# EAGLE board zumy carrier board (EAGLE 6.6.0)
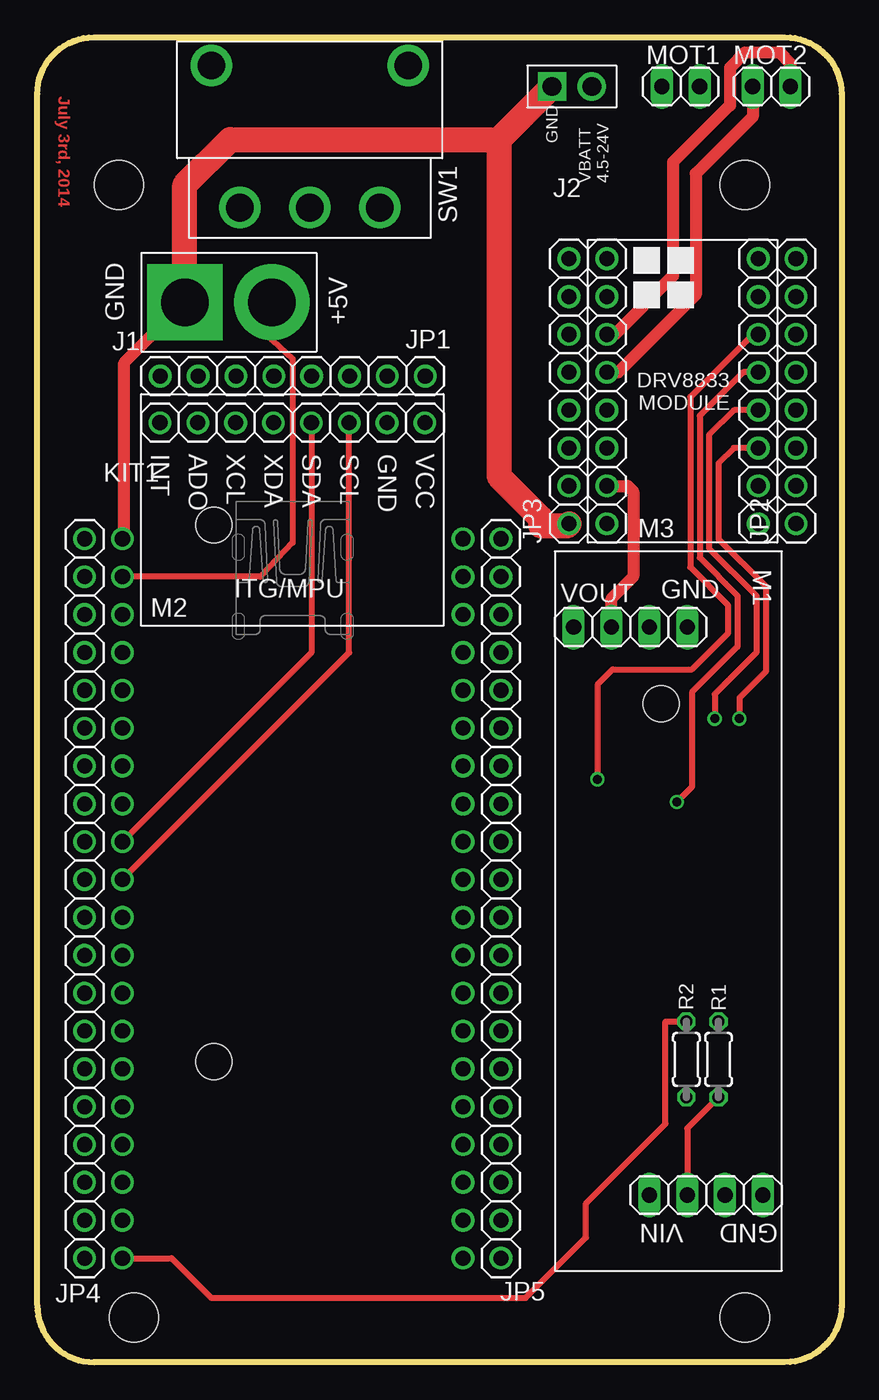
[diagram p0: board, top side]
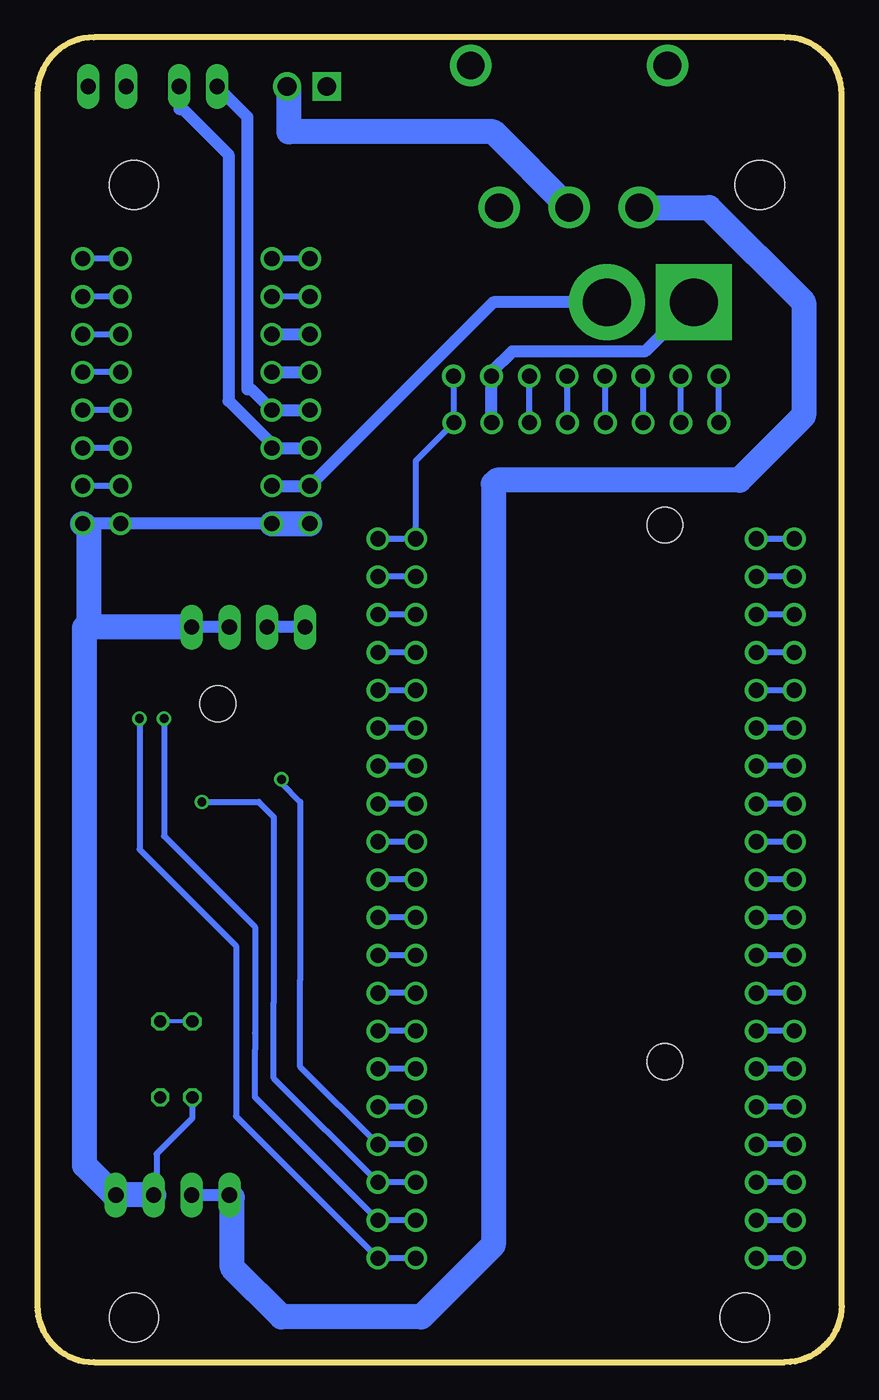
[diagram p1: board, bottom side, seen from below]

Size 53.98 x 88.9 mm. Coordinates in mm from the lower left corner, seen from the top.
Outline: 0,3.81 0,85.09 arc-90 3.81,88.9 50.16,88.9 arc-90 53.98,85.09 53.98,3.81 arc-90 50.16,0 3.81,0 arc-90 0,3.81
Copper layers (1*16): Top 2mil / dielectric 27mil / Bottom 2mil
Design rules "advancedcircuits-standard-biomimetic": minimum track width 5mil, minimum drill 10mil, track to track 5mil, track to pad 5mil, pad to pad 5mil, via to via 5mil, smd to smd 5mil, copper to edge 0.256540625mm, drill to drill 0.256540625mm, minimum pad ring 0.180340625mm, minimum via ring 0.180340625mm, stop-mask expansion 2mil, vias tented up to drill 0mil, thermal gap 10mil
Holes 3.3 mm at 6.49,3 47.49,3 5.49,79 47.49,79
Holes 2.4 mm at 11.86,20.18 41.86,44.18 11.86,56.18

## Footprints (pad centres in the part's own frame; a part is rotated, then mirrored left to right if it is on the bottom)
ODOIRD_PWR = drill 3.2 pad 5.08 square: GND 0,0 | drill 3.2 pad 5.08: PWR 5.842,0
BATT_POWER = drill 1.27 square: GND 0,0 | drill 1.27: PWR 2.667,0
1X08 = drill 1.016: 1 -8.89,0; 2 -6.35,0; 3 -3.81,0; 4 -1.27,0; 5 1.27,0; 6 3.81,0; 7 6.35,0; 8 8.89,0
1X20 = drill 1.016: 1 -24.13,0; 2 -21.59,0; 3 -19.05,0; 4 -16.51,0; 5 -13.97,0; 6 -11.43,0; 7 -8.89,0; 8 -6.35,0; 9 -3.81,0; 10 -1.27,0; 11 1.27,0; 12 3.81,0; 13 6.35,0; 14 8.89,0; 15 11.43,0; 16 13.97,0; 17 16.51,0; 18 19.05,0; 19 21.59,0; 20 24.13,0
MBED-KIT = drill 1.016: D+ 11.43,1.27; D- 11.43,3.81; GND -11.43,24.13; IF+ 11.43,16.51; IF- 11.43,19.05; NR -11.43,16.51; P$5 -11.43,13.97; P$6 -11.43,11.43; P$7 -11.43,8.89; P$8 -11.43,6.35; P$9 -11.43,3.81; P$10 -11.43,1.27; P$11 -11.43,-1.27; P$12 -11.43,-3.81; P$13 -11.43,-6.35; P$14 -11.43,-8.89; P$15 -11.43,-11.43; P$16 -11.43,-13.97; P$17 -11.43,-16.51; P$18 -11.43,-19.05; P$19 -11.43,-21.59; P$20 -11.43,-24.13; P$21 11.43,-24.13; P$22 11.43,-21.59; P$23 11.43,-19.05; P$24 11.43,-16.51; P$25 11.43,-13.97; P$26 11.43,-11.43; P$27 11.43,-8.89; P$28 11.43,-6.35; P$29 11.43,-3.81; P$30 11.43,-1.27; RD+ 11.43,11.43; RD- 11.43,13.97; TD+ 11.43,6.35; TD- 11.43,8.89; VB -11.43,19.05; VIN -11.43,21.59; VOUT 11.43,24.13; VU 11.43,21.59
POLOLU_STEP_DOWN = drill 1.016 long: GND1 -19.05,1.27; GND2 -19.05,-1.27; GND3 19.05,6.35; GND4 19.05,3.81; VIN1 19.05,1.27; VIN2 19.05,-1.27; VOUT1 -19.05,-3.81; VOUT2 -19.05,-6.35
ITG/MPU_MODULE = drill 1.016: ADO -6.372,7.284; GND 6.328,7.284; INT -8.912,7.284; SCL 3.788,7.284; SDA 1.248,7.284; VCC 8.868,7.284; XCL -3.832,7.284; XDA -1.292,7.284
POLOLU_DRV8833_MODULE = drill 1.016: AIN1 1.27,6.35; AIN2 1.27,8.89; AISEN 11.43,3.81; AOUT1 11.43,6.35; AOUT2 11.43,8.89; BIN1 1.27,13.97; BIN2 1.27,11.43; BISEN 11.43,1.27; BOUT1 11.43,13.97; BOUT2 11.43,11.43; GND1 1.27,19.05; GND2 11.43,19.05; NFAULT 1.27,1.27; NSLEEP 1.27,3.81; VIN 11.43,16.51; VMM 1.27,16.51
1X02 = drill 1.016 long: 1 -1.27,0; 2 1.27,0
0204/5 = drill 0.813 octagon: 1 -2.54,0; 2 2.54,0
500SSP1S1M6QEA_SWITCH = drill 1.854: 1 -4.699,0; 2 0,0; 3 4.699,0; P$4 -6.604,9.525; P$5 6.604,9.525

## Placement (x,y rotation side)
J1  ODROID_POWER  [ODOIRD_PWR]  9.91,71.12 0 top
J2  BATT_POWER  [BATT_POWER]  34.54,85.6 0 top
JP1  [1X08]  17.14,66.17 0 top
JP2  [1X08]  50.93,65.15 90 top
JP3  [1X08]  35.69,65.15 90 top
JP4  [1X20]  3.17,31.11 270 top
JP5  [1X20]  31.11,31.11 90 top
KIT1  MBED_NXP_LPC1768  [MBED-KIT]  17.14,31.11 0 top
M1  POLOLU_STEP_DOWN  [POLOLU_STEP_DOWN]  42.35,30.27 270 top
M2  ITG/MPU_MODULE  [ITG/MPU_MODULE]  17.14,55.75 0 top
M3  POLOLU_DRV8833_MODULE  [POLOLU_DRV8833_MODULE]  49.66,75.31 180 top
MOT1  [1X02]  43.18,85.6 180 top
MOT2  [1X02]  49.28,85.6 180 top
R1  [0204/5]  45.72,20.32 270 top
R2  [0204/5]  43.56,20.32 90 top
SW1  500SSP1S1M6QEA  [500SSP1S1M6QEA_SWITCH]  18.29,77.47 0 top

## Library data of the parts
J1 J2 JP1-JP5 KIT1 M1-M3 SW1 = zumy
MOT1 MOT2 = pinhead
R1 R2 = resistor

## Nets
+3V3: JP1.8 JP5.20 KIT1.VOUT M2.VCC
+5V: J1.PWR JP3.2 JP4.2 KIT1.VIN M1.VOUT1 M1.VOUT2 M3.VIN
AIN1: JP2.6 JP5.4 KIT1.P$24 M3.AIN1
AIN2: JP2.5 JP5.3 KIT1.P$23 M3.AIN2
BIN1: JP2.3 JP5.1 KIT1.P$21 M3.BIN1
BIN2: JP2.4 JP5.2 KIT1.P$22 M3.BIN2
GND: J1.GND J2.GND JP1.7 JP2.1 JP3.1 JP4.1 KIT1.GND M1.GND1 M1.GND2 M1.GND3 M1.GND4 M2.GND M3.GND1 M3.GND2 R2.1
MPU_SCL: JP1.6 JP4.10 KIT1.P$10 M2.SCL
MPU_SDA: JP1.5 JP4.9 KIT1.P$9 M2.SDA
N$1: JP1.1 M2.INT
N$2: JP1.2 M2.ADO
N$3: JP1.3 M2.XCL
N$4: JP1.4 M2.XDA
N$10: JP4.15 KIT1.P$15
N$11: JP4.3 KIT1.VB
N$12: JP4.4 KIT1.NR
N$13: JP4.5 KIT1.P$5
N$14: JP4.6 KIT1.P$6
N$15: JP4.7 KIT1.P$7
N$16: JP4.8 KIT1.P$8
N$19: JP4.11 KIT1.P$11
N$20: JP4.12 KIT1.P$12
N$21: JP4.13 KIT1.P$13
N$22: JP4.14 KIT1.P$14
N$24: JP4.16 KIT1.P$16
N$25: JP4.17 KIT1.P$17
N$26: JP4.18 KIT1.P$18
N$27: JP4.19 KIT1.P$19
N$33: JP5.5 KIT1.P$25
N$34: JP5.6 KIT1.P$26
N$35: JP5.7 KIT1.P$27
N$36: JP5.8 KIT1.P$28
N$37: JP5.9 KIT1.P$29
N$38: JP5.10 KIT1.P$30
N$39: JP5.11 KIT1.D+
N$40: JP5.12 KIT1.D-
N$41: JP5.13 KIT1.TD+
N$42: JP5.14 KIT1.TD-
N$43: JP5.15 KIT1.RD+
N$44: JP5.16 KIT1.RD-
N$45: JP5.17 KIT1.IF+
N$46: JP5.18 KIT1.IF-
N$47: JP5.19 KIT1.VU
N$50: JP2.2 M3.VMM
N$55: JP2.7 M3.NSLEEP
N$56: JP2.8 M3.NFAULT
N$59: JP3.3 M3.BOUT1 MOT1.1
N$60: JP3.4 M3.BOUT2 MOT1.2
N$61: JP3.5 M3.AOUT2 MOT2.2
N$62: JP3.6 M3.AOUT1 MOT2.1
N$63: JP3.7 M3.AISEN
N$64: JP3.8 M3.BISEN
SW_VBATT: M1.VIN1 M1.VIN2 R1.2 SW1.1
V_BATT_SENSE: JP4.20 KIT1.P$20 R1.1 R2.2
VBATT: J2.PWR SW1.2

## Tracks (layer width: path | path; a pad name or v marks a point on that pad's centre or on a via)
+3V3
  Bottom 0.406: JP1.8 26.01,66.17 M2.VCC 28.57,60.48 KIT1.VOUT JP5.20
+5V
  Top 0.406: J1.PWR 15.75,68.58 17.14,67.31 17.14,54.99 14.99,52.7 KIT1.VIN
  Top 0.813: M3.VIN 39.62,58.8 40.01,58.42 40.01,52.7 38.54,51.24 M1.VOUT1
  Bottom 0.406: JP4.2 KIT1.VIN
  Bottom 0.813: M3.VIN JP3.2 23.37,71.12 J1.PWR | M1.VOUT2 M1.VOUT1
AIN1  (via drill 0.6)
  Top 0.406: M3.AIN1 48.01,68.96 43.81,64.77 43.81,53.34 46.35,50.8 46.35,48.9 43.94,46.48 38.61,46.48 37.59,45.47 v37.59,39.12
  Bottom 0.406: M3.AIN1 JP2.6 | KIT1.P$24 JP5.4 36.32,19.81 36.32,25.65 36.32,26.16 36.32,37.59 37.59,38.86 v37.59,39.12
AIN2  (via drill 0.6)
  Top 0.406: M3.AIN2 47.37,66.42 44.45,63.5 44.45,53.98 46.99,51.44 46.99,48.01 43.94,44.96 43.94,38.61 v42.93,37.59
  Bottom 0.406: M3.AIN2 JP2.5 | KIT1.P$23 JP5.3 38.1,19.05 38.1,24.13 38.1,25.15 38.1,36.58 39.12,37.59 v42.93,37.59
BIN1  (via drill 0.6)
  Top 0.406: M3.BIN1 46.74,61.34 45.72,60.33 45.72,55.24 48.9,52.07 48.9,46.35 47.12,44.58 v47.12,43.18
  Bottom 0.406: M3.BIN1 JP2.3 | KIT1.P$21 JP5.1 40.64,16.51 40.64,27.94 47.12,34.42 v47.12,43.18
BIN2  (via drill 0.6)
  Top 0.406: M3.BIN2 46.74,63.88 45.09,62.23 45.09,54.61 48.26,51.44 48.26,47.62 45.47,44.83 v45.47,43.18
  Bottom 0.406: M3.BIN2 JP2.4 | KIT1.P$22 JP5.2 39.37,17.78 39.37,20.95 39.37,22.1 39.37,29.21 45.47,35.31 v45.47,43.18
GND
  Top 0.813: KIT1.GND 5.84,55.37 5.84,67.06 J1.GND
  Top 1.676: 30.99,82.04 J2.GND | 30.99,82.04 12.95,82.04 9.91,78.99 J1.GND | 30.99,82.04 30.99,59.44 33.78,56.64 33.78,56.13 35.56,56.13 JP3.1
  Bottom 0.406: JP4.1 KIT1.GND | M3.GND1 48.77,55.88 | R2.1 43.56,16.38 45.97,13.97 45.97,11.4 M1.GND4 | 23.5,66.42 JP1.7 | M2.GND 23.5,63.06
  Bottom 0.813: JP2.1 M3.GND1 M3.GND2 | M1.GND2 M1.GND1 | J1.GND 13.21,67.82 22.1,67.82 23.5,66.42 | 23.5,63.06 JP1.7
  Bottom 1.676: M3.GND2 JP3.1 | 50.8,49.02 50.8,13.21 48.81,11.22 M1.GND3 M1.GND4 | 50.8,49.02 50.8,49.28 | M1.GND1 50.5,49.32 | 50.5,49.32 50.8,49.02 | 50.5,49.32 50.5,55.84 JP2.1
MPU_SCL
  Top 0.406: KIT1.P$10 20.93,47.6 M2.SCL
  Bottom 0.127: 3.3,32.26 JP4.10
  Bottom 0.406: M2.SCL 20.93,66.17 JP1.6 | JP4.10 KIT1.P$10
MPU_SDA
  Top 0.127: 3.3,34.8 JP4.9
  Top 0.406: M2.SDA 18.39,47.6 KIT1.P$9
  Bottom 0.406: M2.SDA 18.39,66.17 JP1.5 | JP4.9 KIT1.P$9
N$1
  Bottom 0.406: M2.INT 8.23,66.17 JP1.1
N$2
  Bottom 0.406: M2.ADO 10.77,66.17 JP1.2
N$3
  Bottom 0.406: M2.XCL 13.31,66.17 JP1.3
N$4
  Bottom 0.406: M2.XDA 15.85,66.17 JP1.4
N$10
  Bottom 0.406: JP4.15 KIT1.P$15
N$11
  Bottom 0.406: JP4.3 KIT1.VB
N$12
  Bottom 0.406: JP4.4 KIT1.NR
N$13
  Bottom 0.406: JP4.5 KIT1.P$5
N$14
  Bottom 0.406: JP4.6 KIT1.P$6
N$15
  Bottom 0.406: JP4.7 KIT1.P$7
N$16
  Bottom 0.406: JP4.8 KIT1.P$8
N$19
  Bottom 0.406: JP4.11 KIT1.P$11
N$20
  Bottom 0.406: JP4.12 KIT1.P$12
N$21
  Bottom 0.406: JP4.13 KIT1.P$13
N$22
  Bottom 0.406: JP4.14 KIT1.P$14
N$24
  Bottom 0.406: JP4.16 KIT1.P$16
N$25
  Bottom 0.406: JP4.17 KIT1.P$17
N$26
  Bottom 0.406: JP4.18 KIT1.P$18
N$27
  Bottom 0.406: JP4.19 KIT1.P$19
N$33
  Bottom 0.406: KIT1.P$25 JP5.5
N$34
  Bottom 0.406: KIT1.P$26 JP5.6
N$35
  Bottom 0.406: KIT1.P$27 JP5.7
N$36
  Bottom 0.406: KIT1.P$28 JP5.8
N$37
  Bottom 0.406: KIT1.P$29 JP5.9
N$38
  Bottom 0.406: KIT1.P$30 JP5.10
N$39
  Bottom 0.406: KIT1.D+ JP5.11
N$40
  Bottom 0.406: KIT1.D- JP5.12
N$41
  Bottom 0.406: KIT1.TD+ JP5.13
N$42
  Bottom 0.406: KIT1.TD- JP5.14
N$43
  Bottom 0.406: KIT1.RD+ JP5.15
N$44
  Bottom 0.406: KIT1.RD- JP5.16
N$45
  Bottom 0.406: KIT1.IF+ JP5.17
N$46
  Bottom 0.406: KIT1.IF- JP5.18
N$47
  Bottom 0.406: KIT1.VU JP5.19
N$50
  Bottom 0.406: M3.VMM JP2.2
N$55
  Bottom 0.406: M3.NSLEEP JP2.7
N$56
  Bottom 0.406: M3.NFAULT JP2.8
N$59
  Bottom 0.813: JP3.3 M3.BOUT1 38.23,61.59 41.15,64.52 41.15,81.03 44.2,84.07 44.45,84.07 MOT1.1
N$60
  Bottom 0.813: JP3.4 M3.BOUT2 39.62,65.28 39.88,65.28 39.88,83.57 MOT1.2
N$61
  Top 0.813: MOT2.2 48.01,83.57 44.2,79.76 44.2,71.63 38.99,66.42 M3.AOUT2
  Bottom 0.813: M3.AOUT2 JP3.5
N$62
  Top 0.813: M3.AOUT1 38.73,68.96 42.67,72.9 42.67,80.52 46.48,84.33 46.48,86.87 47.5,87.88 49.78,87.88 50.55,87.12 MOT2.1
  Bottom 0.813: JP3.6 M3.AOUT1
N$63
  Bottom 0.406: JP3.7 M3.AISEN
N$64
  Bottom 0.406: JP3.8 M3.BISEN
SW_VBATT
  Top 0.406: R1.2 43.62,15.68 M1.VIN1
  Bottom 0.813: M1.VIN1 M1.VIN2
  Bottom 1.676: SW1.1 8.89,77.47 2.54,71.12 2.54,63.5 6.86,59.18 23.11,59.18 23.37,58.93 23.37,7.87 28.19,3.05 37.59,3.05 40.89,6.35 40.89,11.03 M1.VIN2
V_BATT_SENSE
  Top 0.406: KIT1.P$20 9.02,6.99 11.68,4.32 32.77,4.32 36.83,8.38 36.83,10.67 42.16,16 42.16,22.86 R2.2
  Bottom 0.254: R2.2 R1.1
  Bottom 0.406: JP4.20 KIT1.P$20
VBATT
  Bottom 1.676: SW1.2 23.37,82.55 37.08,82.55 37.08,85.47 J2.PWR

## Text on the board
Top: July 3rd, 2014
Document: BATT | ON | OFF | ODROID / Pwr
tDocu: Biomimetic Millisystems Lab | Rev C | Zumy v0.1 | A.J. Chen / A. Pullin / 2014